# Altium PCB US_Driver.PcbDoc
Units mm, origin at the board's own origin, x right, y up, seen from the top; angles counter-clockwise.
Board outline 99.96 x 100.21 mm, 2 copper layers (Top Layer, Bottom Layer); 72 components, 39 nets, 187 pads, 0 vias.
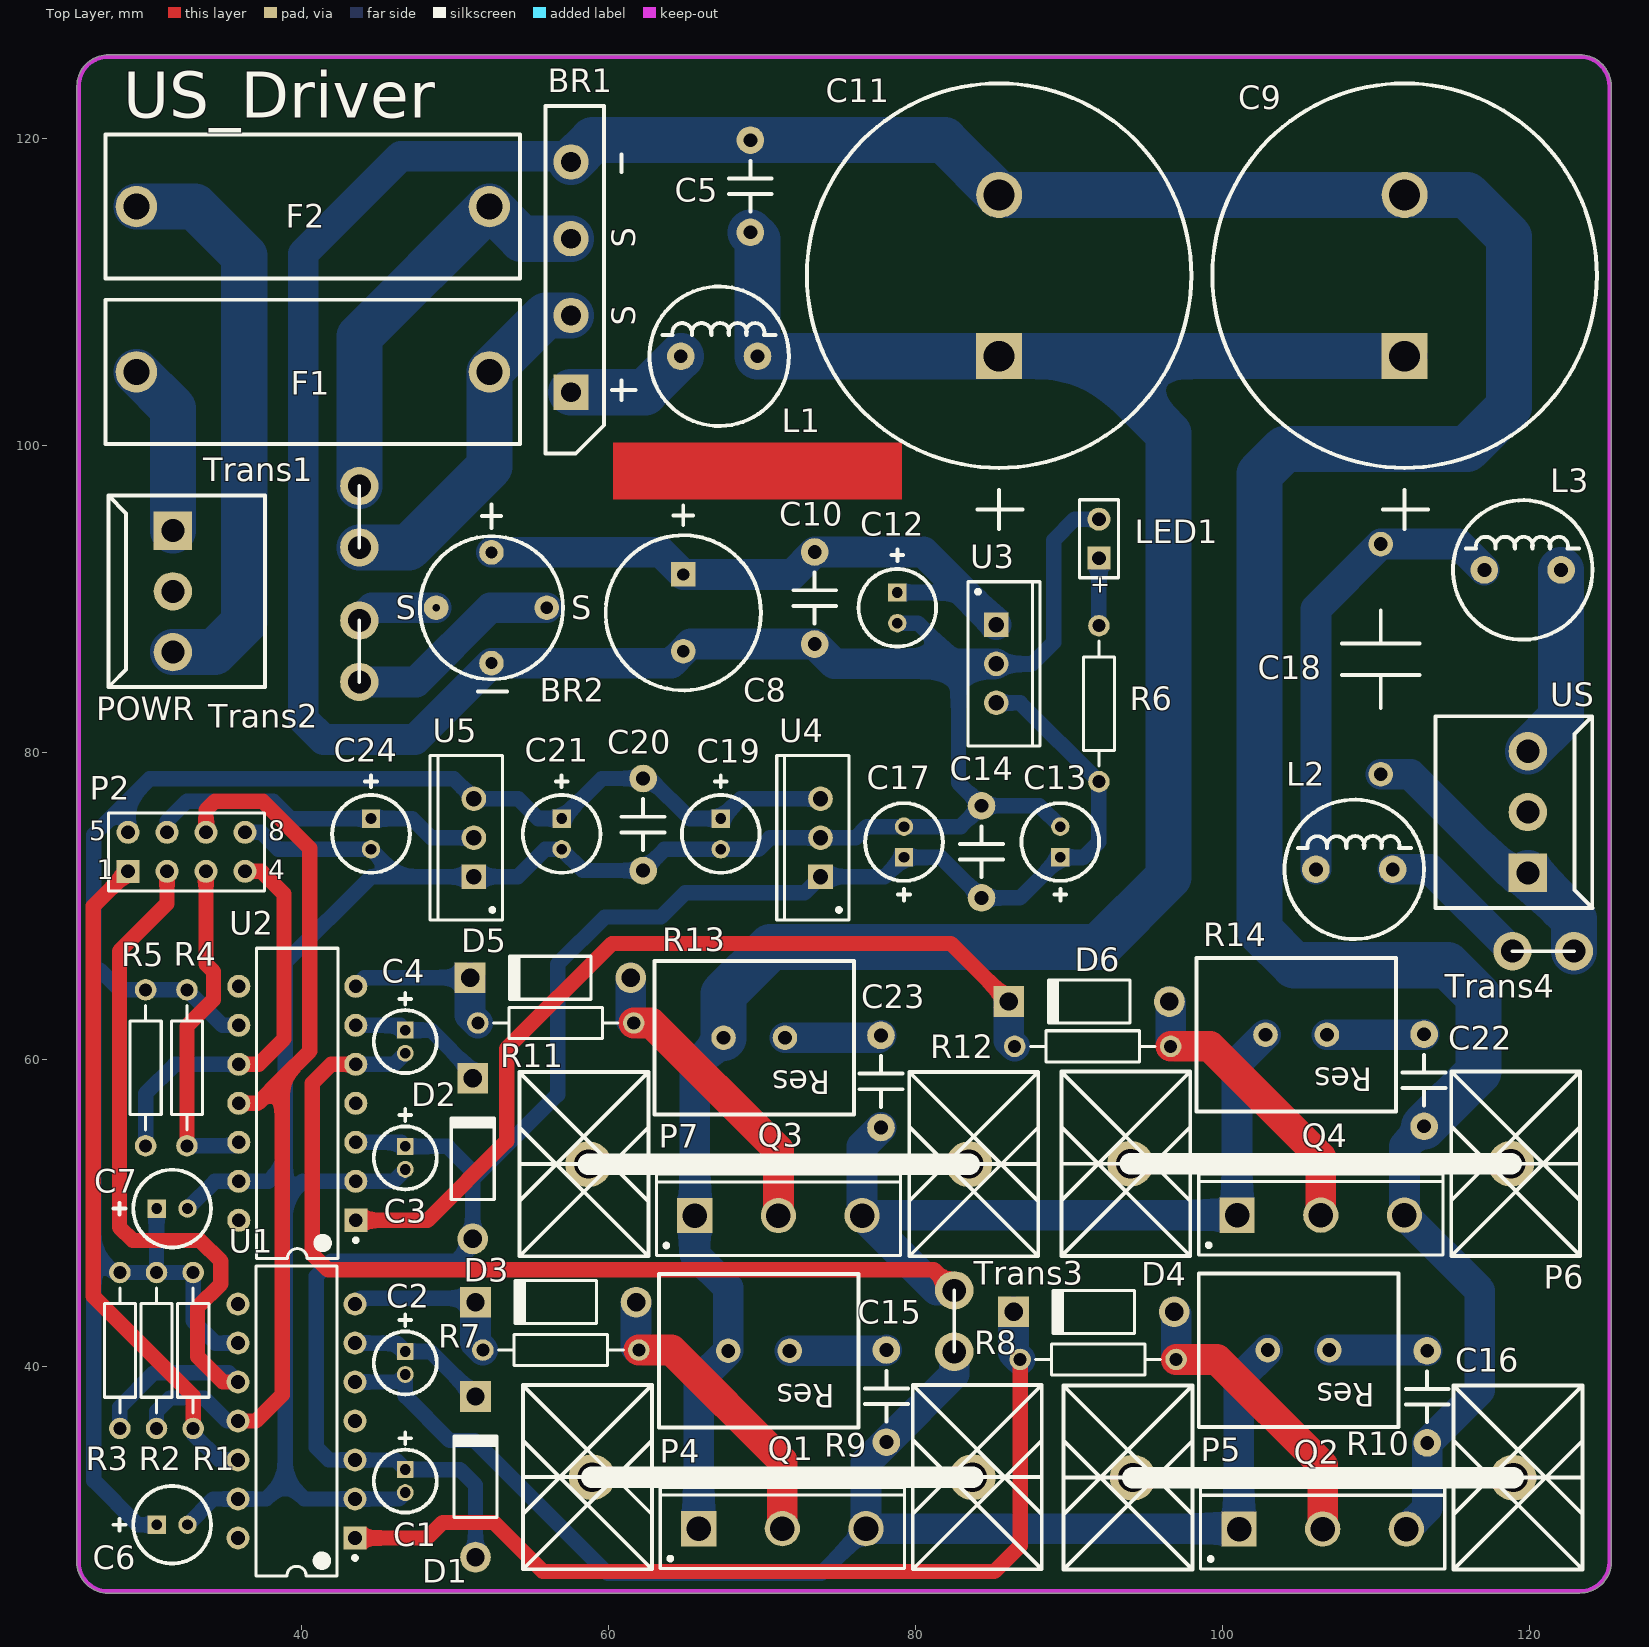
[diagram p0: Top Layer view]
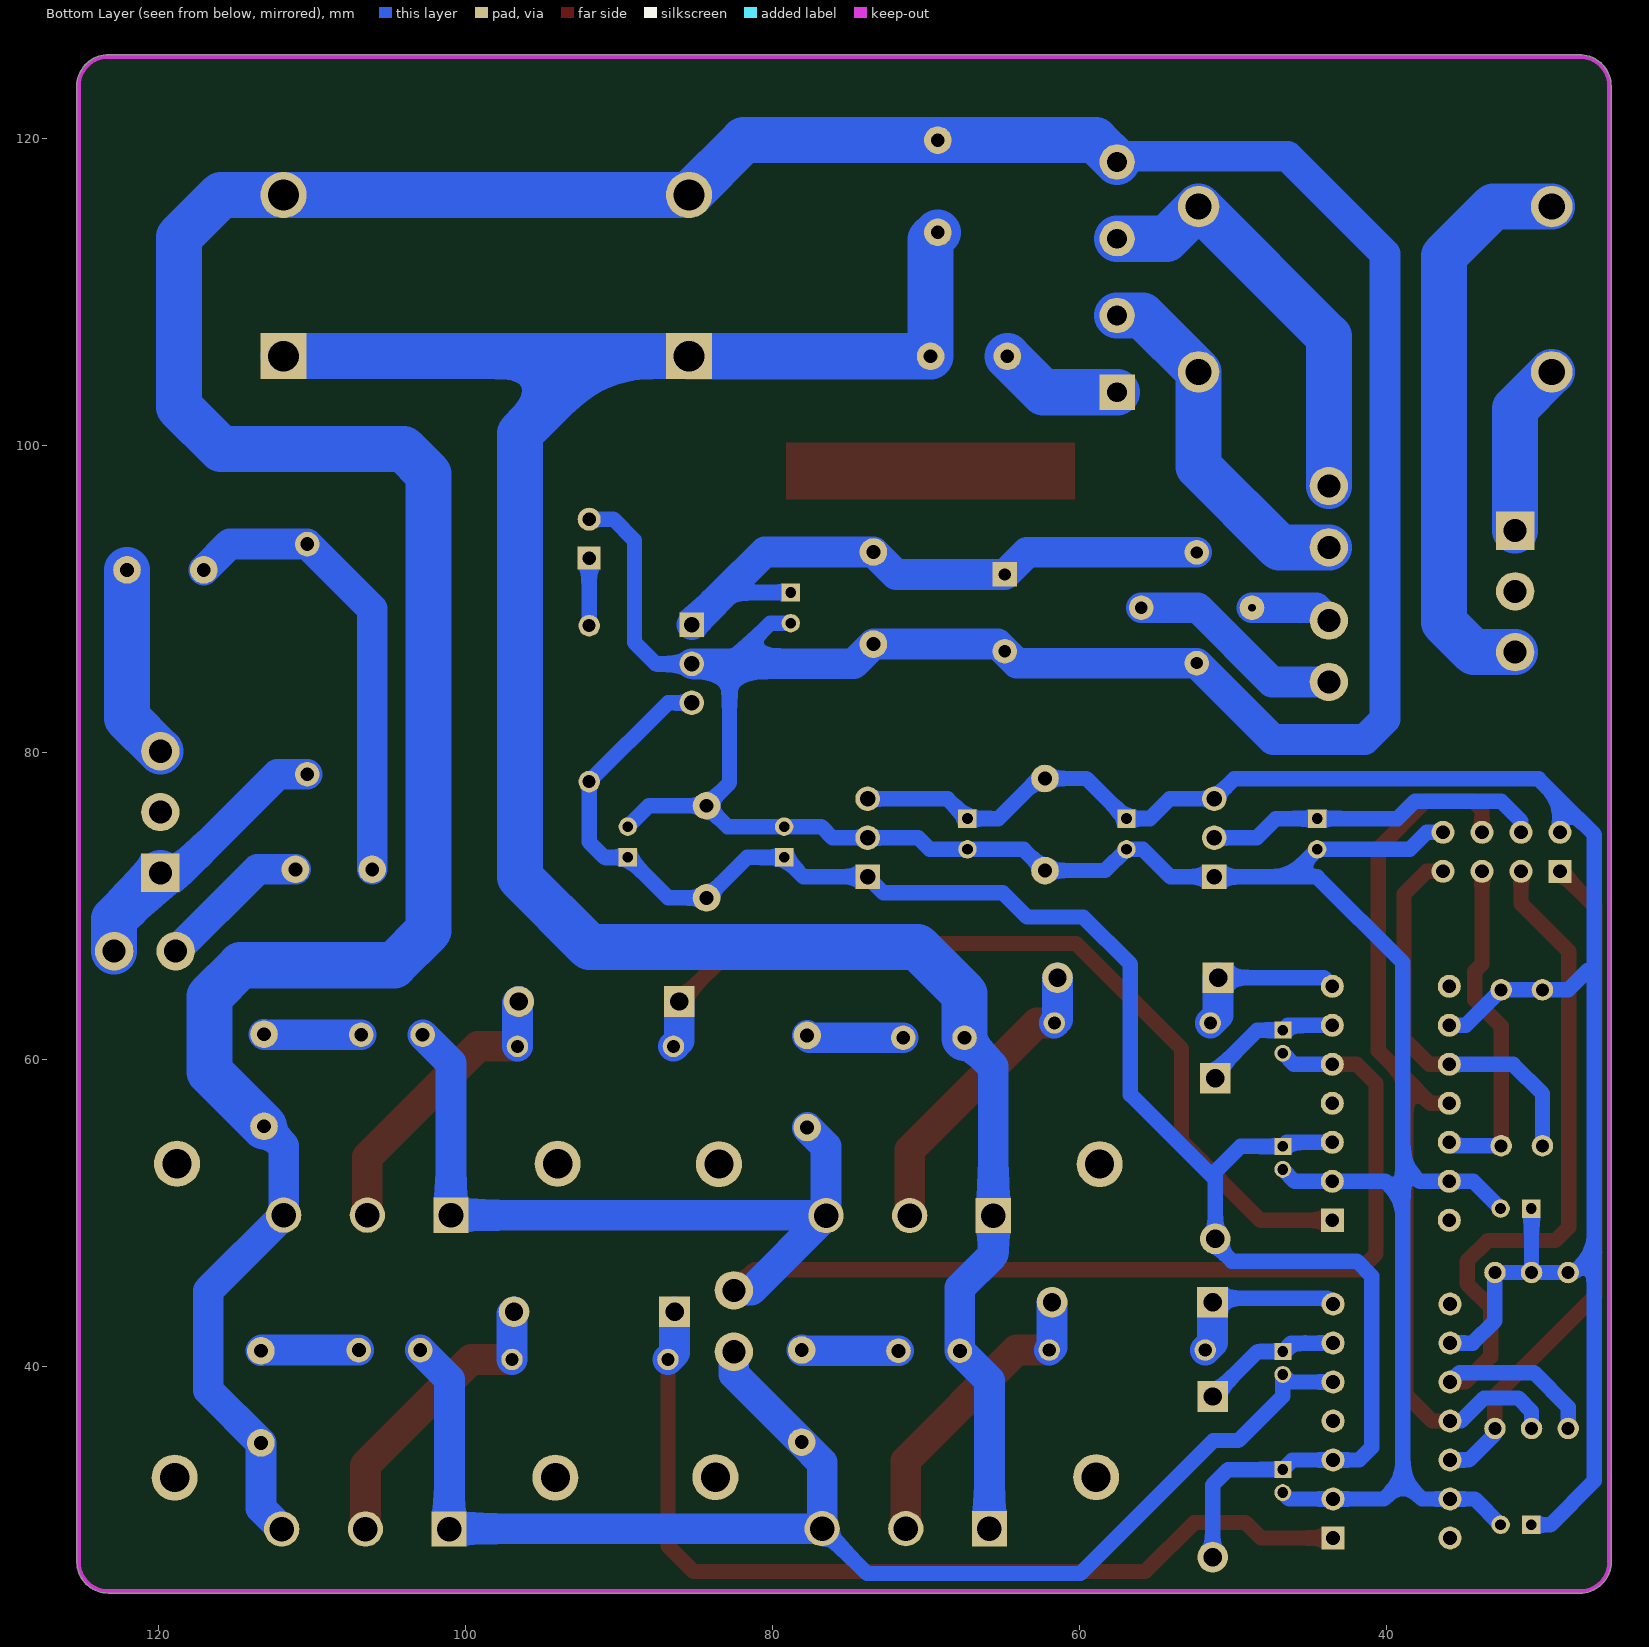
[diagram p1: Bottom Layer view, seen from below]

## Layer stack, top to bottom
Top Solder: solder mask 0.0102, Solder Resist, Dk 3.5
Top Layer: signal copper 0.0356
Dielectric 1: dielectric 0.32, FR-4, Dk 4.8
Bottom Layer: signal copper 0.0356
Bottom Solder: solder mask 0.0102, Solder Resist, Dk 3.5

## Board outline
25.391,27.305 ccw(c27.432,27.305) 27.432,25.264 ccw(c27.432,25.392) 27.477,25.273 123.28,25.273 ccw(c123.292,25.399) 123.29,25.272 ccw(c123.317,27.305) 125.35,27.278 ccw(c125.222,27.28) 125.35,27.28 ccw(c125.222,27.28) 125.347,27.306 ccw(c125.222,27.33) 125.349,27.33 125.349,123.444 ccw(c123.317,123.444) 123.276,125.476 ccw(c123.266,125.349) 123.266,125.476 27.508,125.476 ccw(c27.508,125.349) 27.493,125.475 ccw(c27.432,123.444) 25.4,123.444 ccw(c25.527,123.444) 25.4,123.444 ccw(c25.527,123.444) 25.4,123.444 25.4,27.35 ccw(c25.519,27.305)

## Design rules (kind name [scope] priority, off if disabled: settings)
Clearance [All] p1: gap=0.254
PolygonConnect [All] p1: connectstyle=Relief reliefconductorwidth=0.254 reliefentries=4 polygonreliefangle="90 Angle" airgapwidth=0.254
RoutingVias [All] p1: holewidth=0.711 width=1.27 viastyle="Through Hole" minholewidth=0.711 minwidth=1.27 maxholewidth=0.711 maxwidth=1.27
SolderMaskExpansion [All] p1: expansion=0.102
UnpouredPolygon [All] p1: allowunpoured=FALSE
Width Width_POWER [InNet('300V','15V','5V','3.3V')] p1: maxlimit=3 minlimit=1 preferedwidth=2
Width [All] p2: maxlimit=3 minlimit=0.254 preferedwidth=1
29 further rules are at their usual default settings.

## Components (designator, comment, footprint, x,y, rotation, side; value= is the part's Value field where it differs from the comment)
BR1 "BRIDGE" GBU4M 57.582,110.998 r90 top
BR2 "BRIDGE" BR_CIRCLE 52.4,89.458 r0 top
C1 "Cap Pol3" Cap_4*7 46.787,32.563 r270 top
C2 "Cap Pol3" Cap_4*7 46.787,40.259 r270 top
C3 "Cap Pol3" Cap_4*7 46.787,53.619 r270 top
C4 "Cap Pol3" Cap_4*7 46.787,61.189 r270 top
C5 "Cap Semi" 瓷片电容 69.266,116.916 r270 top
C6 "Cap Pol3" Cap_5*11 31.598,29.718 r0 top
C7 "Cap Pol3" Cap_5*11 31.598,50.317 r0 top
C8 "Cap Pol1" Cap_10*20 64.897,89.129 r270 top
C9 "Cap Pol1" Cap_450V 111.887,111.1 r90 top
C10 "Cap Semi" 瓷片电容 73.457,90.093 r90 top
C11 "Cap Pol1" Cap_450V 85.471,111.1 r90 top
C12 "Cap Pol1" Cap_5*11 78.842,89.453 r270 top
C13 "Cap Pol1" Cap_5*11 89.459,74.198 r90 top
C14 "Cap Semi" 瓷片电容 84.328,73.558 r270 top
C15 "Cap" 瓷片电容 78.13,38.1 r90 top
C16 "Cap" 瓷片电容 113.36,38.049 r90 top
C17 "Cap Pol1" Cap_5*11 79.273,74.198 r90 top
C18 "Cap" Cap_15 110.338,86.106 r90 top
C19 "Cap Pol1" Cap_5*11 67.335,74.722 r270 top
C20 "Cap Semi" 瓷片电容 62.281,75.336 r90 top
C21 "Cap Pol1" Cap_5*11 56.972,74.722 r270 top
C22 "Cap" 瓷片电容 113.157,58.674 r90 top
C23 "Cap" 瓷片电容 77.775,58.598 r90 top
C24 "Cap Pol1" Cap_5*11 44.552,74.722 r270 top
D1 "1N4007" DO-41 51.359,32.842 r90 top
D2 "1N4007" DO-41 51.181,53.569 r90 top
D3 "1N4007" DO-41 56.591,44.221 r180 top
D4 "1N4007" DO-41 91.643,43.586 r180 top
D5 "1N4007" DO-41 56.236,65.354 r180 top
D6 "1N4007" DO-41 91.338,63.805 r180 top
F1 "Fuse" FUSE 40.767,104.826 r0 top
F2 "Fuse" FUSE 40.767,115.595 r0 top
L1 "Inductor" 工字电感8*10 67.234,105.842 r0 top
L2 "Inductor" 工字电感8*10 108.61,72.415 r0 top
L3 "Inductor" 工字电感8*10 119.583,91.923 r0 top
LED1 "LED1" BAT-2 91.973,93.955 r90 top
P2 "Header 4X2A" HDR2X4_CEN 28.727,72.288 r0 top
P4 "散热片" 散热器_TO247 71.349,32.817 r180 top
P5 "散热片" 散热器_TO247 106.578,32.791 r180 top
P6 "散热片" 散热器_TO247 106.426,53.238 r180 top
P7 "散热片" 散热器_TO247 71.12,53.213 r180 top
POWR "POWR" CH3.96-3P 31.648,90.526 r270 top (schematic designator P1)
Q1 "MOSFET-N" TO-247 71.349,29.464 r0 top
Q2 "MOSFET-N" TO-247 106.553,29.439 r0 top
Q3 "MOSFET-N" TO-247 71.095,49.86 r0 top
Q4 "MOSFET-N" TO-247 106.426,49.886 r0 top
R1 "Res2" AXIAL-0.4 32.969,41.072 r90 top
R2 "Res2" AXIAL-0.4 30.582,41.072 r90 top
R3 "Res2" AXIAL-0.4 28.194,41.072 r90 top
R4 "Res2" AXIAL-0.4 32.563,59.487 r90 top
R5 "Res2" AXIAL-0.4 29.87,59.487 r90 top
R6 "Res2" AXIAL-0.4 91.973,83.21 r270 top
R7 "Res2" AXIAL-0.4 56.921,41.097 r0 top
R8 "Res2" AXIAL-0.4 91.923,40.488 r0 top
R9 "Res2" Res_10W_立式 69.825,41.046 r180 top
R10 "Res2" Res_10W_立式 104.978,41.097 r180 top
R11 "Res2" AXIAL-0.4 56.591,62.408 r0 top
R12 "Res2" AXIAL-0.4 91.567,60.884 r0 top
R13 "Res2" Res_10W_立式 69.52,61.443 r180 top
R14 "Res2" Res_10W_立式 104.826,61.646 r180 top
Trans1 "Trans_Part" Trans_Part 43.79,91.389 r270 top
Trans2 "Trans_Part" Trans_Part 43.79,90.627 r90 top
Trans3 "Trans_Part" Trans_Part 82.55,38.989 r270 top
Trans4 "Trans_Part" Trans_Part 124.917,67.081 r0 top
U1 "IR2110" DIP-14 39.7,36.474 r180 top
U2 "IR2110" DIP-14 39.751,57.175 r180 top
U3 "7815" TO-220AB 85.293,85.801 r270 top
U4 "7805" TO-220AB 73.838,74.473 r90 top
U5 "AMS1117-3.3" TO-220AB 51.257,74.473 r90 top
US "US" CH3.96-3P 119.913,76.149 r90 top (schematic designator P3)

## Footprints (in the part's own frame and the unit in brackets; to place one, negate y for a bottom-side part, rotate by r counter-clockwise, add the part's x,y. Pads: shape width x height; smd on the part's side, far side on the other; paste and mask are expansions set on the pad)
AXIAL-0.4 [mm] "Axial Device, Thru-Hole; 2 Leads; 0.4 in Pin Spacing"
  round 1.4 hole 0.85: 1(-5.08,0) 2(5.08,0)
  silkscreen extent -4.06,-1.02 4.06,1.02
BAT-2 [mm] "Battery; 2 Leads"
  rect 1.5x1.5 hole 0.9: 1(-1.27,0)
  round 1.5 hole 0.9: 2(1.27,0)
  silkscreen extent -2.54,-1.27 2.54,1.27
BR_CIRCLE [mm]
  round 1.6 hole 0.8: 1(0,3.606) 3(0,-3.606) 4(3.606,0)
  round 1.6 hole 0.5: 2(-3.606,0)
  silkscreen extent -4.66,-5.46 4.66,6.73
Cap_4*7 [mm] "Chip Capacitor, Body 2.0x1.3mm, IPC High Density"
  rect 1.1x1.1 hole 0.7: 1(-0.75,0)
  round 1.1 hole 0.7: 2(0.75,0)
  silkscreen extent -3.17,-2.05 2.05,2.05
Cap_5*11 [mm] "Chip Capacitor, Body 2.0x1.3mm, IPC High Density"
  rect 1.2x1.2 hole 0.7: 1(-1,0)
  round 1.2 hole 0.7: 2(1,0)
  silkscreen extent -3.81,-2.53 2.53,2.53
Cap_10*20 [mm] "Polarized Capacitor (Radial); 2 Leads"
  rect 1.6x1.6 hole 0.8: 1(-2.5,0)
  round 1.6 hole 0.8: 2(2.5,0)
  silkscreen extent -6.98,-5.05 5.06,5.06
Cap_15 [mm] "CBB无极15mm脚距"
  round 1.6 hole 0.9: 1(-7.5,0) 2(7.5,0)
  silkscreen extent -3.17,-2.54 3.17,2.54
Cap_450V [mm] "Polarized Capacitor (Radial); 2 Leads"
  rect 3x3 hole 2: 1(-5.25,0)
  round 3 hole 2: 2(5.25,0)
  silkscreen extent -16.51,-12.52 12.52,12.52
CH3.96-3P [mm] "接线端子插座"
  rect 2.5x2.5 hole 1.5: 1(-3.96,0)
  round 2.5 hole 1.5: 2(0,0) 3(3.96,0)
  silkscreen extent -6.24,-4.21 6.24,6
DIP-14 [mm] "DIP; 14 Leads; Row Spacing 7.62 mm; Pitch 2.54 mm"
  rect 1.5x1.5 hole 0.9: 1(-3.81,7.62)
  round 1.5 hole 0.9: 2(-3.81,5.08) 3(-3.81,2.54) 4(-3.81,0) 5(-3.81,-2.54) 6(-3.81,-5.08) 7(-3.81,-7.62) 8(3.81,-7.62) 9(3.81,-5.08) 10(3.81,-2.54) 11(3.81,0) 12(3.81,2.54) 13(3.81,5.08) 14(3.81,7.62)
  silkscreen extent -3.94,-10.1 2.65,10.1, body extent -3.6,-10.1 3.6,10.1, height 5.08
DO-41 [mm] "Diode, Axial; Body 5.2 x 2.7 mm (LxDia. max), Lead Dia. 0.86 mm (max)"
  round 2 hole 1.2: 1(-5.23,0)
  rect 2x2 hole 1.2: 2(5.23,0)
  silkscreen extent -2.65,-1.4 2.75,1.4
FUSE [mm] "保险丝座"
  round 2.7 hole 1.7: 1(-11.5,0) 2(11.5,0)
  silkscreen extent -13.5,-4.7 13.5,4.7
GBU4M [mm]
  rect 2.3x2.3 hole 1.3: 1(-7.5,0)
  round 2.3 hole 1.3: 2(-2.5,0) 3(2.5,0) 4(7.5,0)
  silkscreen extent -11.5,-4.19 11.15,1.65
HDR2X4_CEN [mm] "Connector; Header; 4x2 Position"
  rect 1.5x1.5 hole 0.9: 1(0,0)
  round 1.5 hole 0.9: 2(2.54,0) 3(5.08,0) 4(7.62,0) 5(0,2.54) 6(2.54,2.54) 7(5.08,2.54) 8(7.62,2.54)
  silkscreen extent -1.27,-1.27 8.89,3.81
Res_10W_立式 [mm] "立式水泥电阻"
  round 1.6 hole 0.9: 1(-2,0) 2(2,0)
  silkscreen extent -6.5,-5 6.5,5
TO-220AB [mm] "TO, Thru-Hole, Vertical, Heatsink Mounted; 3 In-Line Leads; Pitch 2.54 mm"
  rect 1.6x1.6 hole 1: 1(-2.54,0)
  round 1.6 hole 1: 2(0,0) 3(2.54,0)
  silkscreen extent -5.35,-1.85 5.35,2.85, body extent -5.4,-1.9 5.4,2.9, height 19.3
TO-247 [mm] "SIP with Mounting Hole; 3 Leads; Body 20 x 15.6 x 5 mm (typ); Pitch 5.45 mm"
  rect 2.3x2.3 hole 1.6: 1(-5.45,0)
  round 2.3 hole 1.6: 2(0,0) 3(5.45,0)
  silkscreen extent -7.95,-2.6 7.95,2.7, body extent -7.95,-2.6 7.95,2.7, height 24.6
Trans_Part [mm] "变压器单个绕组"
  round 2.5 hole 1.5: 1(-6,0) 2(-2,0)
  silkscreen extent -6,0 -2,0
工字电感8*10 [mm] "Chip Inductor, Body 1.0x0.5mm, IPC High Density"
  round 1.8 hole 0.9: 1(-2.5,0) 2(2.5,0)
  silkscreen extent -4.54,-4.54 4.54,4.54
散热器_TO247 [mm]
  round 3 hole 1.9: 1(-12.4,0) 2(12.4,0)
  silkscreen extent -16.9,-6 16.9,6
瓷片电容 [mm] "6mm脚距"
  round 1.8 hole 0.9: 1(-3,0) 2(3,0)
  silkscreen extent -1.65,-1.4 1.65,1.4

## Part data
BR1: "BR"
BR2: library part BRIDGE_Circle, "BR"
C1 C2 C3 C4 C6 C7: "Polarized Capacitor (Surface Mount)"
C5 C10 C14 C20: "Capacitor (Semiconductor SIM Model)"
C8 C9 C11 C12 C13 C17 C19 C21 C24: "Polarized Capacitor (Radial)"
C15 C16 C18 C22 C23: "Capacitor"
D1 D2 D3 D4 D5 D6: library part "Diode 1N4007", "1 Amp General Purpose Rectifier"
LED1: "Typical RED GaAs LED"
P2: "Header, 4-Pin, Dual row"
POWR US: library part "Header 3", "Header, 3-Pin"
Q1 Q2 Q3 Q4: "N-Channel MOSFET"
R1 R2 R3 R4 R5 R6 R7 R8 R9 R10 R11 R12 R13 R14: "Resistor"
U3: library part 7805

## Nets (pads, with @x,y where several pads share a name; then routed paths per layer and width w, separated by ;. In a path a pad name is that pad's centre, name@x,y a point inside that pad or via, vN(x,y) a via of type N, cw(c..) or ccw(c..) an arc to the next point about the centre after c; other vN are vias at no path point)
3.3V: C24.1 P2.6 U5.2 | length 22.3
  Bottom Layer w1: P2.6 31.267,75.565 32.563,76.86 38.176,76.86 39.315,75.722 C24.1 47.239,75.722 48.489,74.473 U5.2
5V: C6.1 C7.1 C19.1 C20.2 C21.1 P2.5 R1.2 R2.2 R3.2 R4.2 R5.2 U1.9 U2.9 U4.3 U5.3 | length 130.5
  Bottom Layer w1: 26.899,65.862 28.194,64.567 R5.2 R4.2 34.874,62.255 U2.9 ; P2.5 28.727,76.911 ; C6.1 29.362,29.718 26.492,32.588 26.492,47.473 ; C7.1 30.582,50.301 R2.2 ; U1.9 34.417,41.554 32.969,43.002 R1.2 R2.2 ; U4.3 68.626,77.013 C19.1 65.324,75.722 62.71,78.336 C20.2 59.587,78.336 C21.1 55.444,75.722 54.153,77.013 U5.3 49.962,78.308 30.124,78.308 28.727,76.911 ; 26.492,47.473 26.492,74.676 28.727,76.911 ; 26.492,47.473 27.813,46.152 R3.2 R2.2
15V: C1.1 C3.1 C13.1 C14.2 C17.1 D1.1 D2.1 R6.2 U1.3 U2.3 U3.3 U4.1 | length 121.3
  Bottom Layer w1: U2.3 46.521,54.635 C3.1 49.542,54.369 51.181,52.73 51.181,52.197 ; D1.1 51.359,32.309 50.355,33.313 C1.1 46.165,33.934 U1.3 41.808,33.934 40.996,34.747 40.996,45.923 41.961,46.888 50.112,46.888 51.181,47.958 51.181,52.197 ; U3.3 86.843,83.261 R6.2 91.973,74.193 90.978,73.198 C13.1 86.819,70.558 C14.2 81.688,73.198 C17.1 78.008,71.933 U4.1 72.796,70.891 65.024,70.891 63.449,69.317 59.792,69.317 56.718,66.243 56.718,57.734 51.181,52.197
300V: C5.2 C9.1 C11.1 L1.2 Q1.1 Q3.1 R9.2 R13.2 | length 155.9
  Bottom Layer w2: Q1.1 65.899,39.12 R9.2 67.825,45.155 65.645,47.335 Q3.1 65.645,59.567 R13.2
  Bottom Layer w3: R13.2 67.52,64.294 70.587,67.361 91.948,67.361 96.495,71.907 96.495,100.813 91.458,105.85 ; C5.2 69.734,113.448 L1.2 85.463,105.842 C11.1 91.458,105.85 ; C9.1 91.458,105.85
BR1: D3.2 R7.1 U1.7 | length 11.4
  Bottom Layer w1: U1.7 43.891,44.475 51.107,44.475 D3.2
  Bottom Layer w2: D3.2 51.361,41.577 R7.1
BR2: D4.2 R8.1 U1.1 | length 61.2
  Top Layer w1: U1.1 48.209,28.854 49.225,29.87 52.553,29.87 55.753,26.67 85.166,26.67 86.843,28.346 R8.1
  Bottom Layer w2: D4.2 86.413,40.917 R8.1
BR3: D5.2 R11.1 U2.7 | length 10.8
  Bottom Layer w1: U2.7 44.12,65.354 D5.2
  Bottom Layer w2: D5.2 51.006,62.913 R11.1
BR4: D6.2 R12.1 U2.1 | length 58.2
  Top Layer w1: U2.1 48.235,49.555 53.391,54.712 53.391,60.731 60.249,67.589 82.324,67.589 D6.2
  Bottom Layer w2: D6.2 86.108,61.262 R12.1
CT_1: P2.1 R1.1 U1.12 | length 43.9
  Top Layer w1: P2.1 26.467,70.028 26.467,44.602 32.969,38.1 R1.1
  Bottom Layer w1: R1.1 32.969,35.636 34.671,33.934 U1.12
CT_2: P2.2 R3.1 U1.10 | length 52.4
  Top Layer w1: P2.2 31.267,70.18 28.169,67.081 28.169,49.098 29.032,48.235 33.426,48.235 34.773,46.888 34.773,45.415 33.249,43.891 33.249,40.665 34.9,39.014 U1.10
  Bottom Layer w1: R3.1 28.194,37.389 30.429,39.624 35.281,39.624 U1.10
CT_3: P2.3 R4.1 U2.12 | length 22.3
  Top Layer w1: R4.1 32.563,62.205 34.29,63.932 34.29,65.761 33.807,66.243 P2.3
  Bottom Layer w1: R4.1 35.712,54.407 U2.12
CT_4: P2.4 R5.1 U2.10 | length 26.5
  Top Layer w1: U2.10 37.236,59.715 38.887,61.366 38.887,70.815 37.414,72.288 P2.4
  Bottom Layer w1: R5.1 29.87,57.81 31.775,59.715 U2.10
GND: BR1.4 BR2.3 C1.2 C3.2 C5.1 C6.2 C7.2 C8.2 C9.2 C10.1 C11.2 C12.2 C13.2 C14.1 C16.1 C17.2 C19.2 C20.1 C21.2 C22.1 C24.2 LED1.2 P2.8 Q2.3 Q4.3 U1.2 U1.13 U2.2 U2.13 U3.2 U4.2 U5.1 | length 442.4
  Bottom Layer w1: C6.2 34.274,31.394 U1.13 37.719,31.394 38.964,32.639 ; C7.2 34.376,52.095 U2.13 37.871,52.095 38.964,53.188 ; P2.8 37.414,74.828 38.521,73.722 C24.2 46.341,71.933 ; C1.2 46.368,31.394 U1.2 40.208,31.394 38.964,32.639 ; C3.2 46.013,52.095 U2.2 40.107,52.095 38.964,50.952 ; C12.2 80.177,88.453 82.829,85.801 82.829,78.057 C14.1 ; U3.2 87.63,85.801 89.027,87.198 89.027,93.853 90.399,95.225 LED1.2 ; C13.2 88.099,76.558 C14.1 ; 38.964,32.639 38.964,50.952 ; 38.964,50.952 38.964,53.188 ; 38.964,53.188 38.964,66.345 44.552,71.933 46.341,71.933 ; 46.341,71.933 U5.1 54.102,71.933 55.891,73.722 C21.2 58.358,72.336 C20.1 63.666,73.722 C19.2 69.785,73.722 70.536,74.473 U4.2 76.124,74.473 76.849,75.198 C17.2 82.968,75.198 C14.1
  Bottom Layer w2: BR1.4 57.208,118.872 46.482,118.872 40.132,112.522 40.132,82.194 41.453,80.874 47.422,80.874 BR2.3 64.12,85.852 C8.2 65.361,87.093 C10.1 74.749,85.801 82.829,85.801 U3.2 ; Q2.3 113.36,30.796 C16.1 116.789,38.478 116.789,44.972 Q4.3 111.876,54.393 C22.1
  Bottom Layer w3: BR1.4 59,119.916 C5.1 81.904,119.916 C11.2 C9.2 115.959,116.35 118.694,113.614 118.694,102.54 115.951,99.797 104.064,99.797 102.438,98.171 102.438,68.428 104.699,66.167 114.681,66.167 116.713,64.135 116.713,59.23 C22.1
IR_EN: P2.7 R2.1 U1.11 U2.11 | length 60.5
  Top Layer w1: P2.7 33.807,76.276 34.392,76.86 37.49,76.86 40.564,73.787 40.564,60.579 38.76,58.776 ; U1.11 37.059,36.474 38.76,38.176 38.76,58.776 ; U2.11 37.16,57.175 38.76,58.776
  Bottom Layer w1: R2.1 30.582,37.109 31.445,37.973 33.68,37.973 35.179,36.474 U1.11
NetBR1_1: BR1.1 L1.1 | length 8.1
  Bottom Layer w3: BR1.1 62.39,103.498 L1.1
NetBR1_2: BR1.2 F1.2 Trans1.2 | length 23.7
  Bottom Layer w3: Trans1.2 47.009,93.389 52.267,98.647 F1.2 55.939,108.498 BR1.2
NetBR1_3: BR1.3 F2.2 Trans1.1 | length 27.9
  Bottom Layer w3: Trans1.1 43.79,107.118 F2.2 54.364,113.498 BR1.3
NetBR2_1: BR2.1 C8.1 C10.2 C12.1 U3.1 | length 40.4
  Bottom Layer w1: C12.1 83.181,90.453
  Bottom Layer w2: BR2.1 63.461,93.064 C8.1 71.992,91.629 C10.2 80.541,93.093 83.181,90.453 U3.1
NetBR2_2: BR2.2 Trans2.2 | length 5.3
  Bottom Layer w2: Trans2.2 44.62,89.458 BR2.2
NetBR2_4: BR2.4 Trans2.1 | length 14.2
  Bottom Layer w2: Trans2.1 47.492,84.627 52.323,89.458 BR2.4
NetC2_1: C2.1 D1.2 U1.6 | length 9.3
  Bottom Layer w1: U1.6 46.241,41.554 C2.1 48.422,41.009 D1.2
NetC4_1: C4.1 D2.2 U2.6 | length 9.7
  Bottom Layer w1: U2.6 46.47,62.255 C4.1 48.45,61.939 51.181,59.207 D2.2 D2.2@51.181,58.418
NetC15_2: C15.2 R9.1 | length 6.3
  Bottom Layer w2: R9.1 78.077,41.046 C15.2
NetC16_2: C16.2 R10.1 | length 6.4
  Bottom Layer w2: R10.1 113.312,41.097 C16.2
NetC18_1: C18.1 Trans4.2 US.1 | length 18.6
  Bottom Layer w2: C18.1 112.275,78.606 118.692,72.189 US.1
  Bottom Layer w3: US.1 122.917,69.185 Trans4.2
NetC18_2: C18.2 L2.1 L3.1 | length 30.4
  Bottom Layer w2: L2.1 106.11,89.379 C18.2 115.4,93.606 L3.1
NetC22_2: C22.2 R14.1 | length 6.3
  Bottom Layer w2: R14.1 113.129,61.646 C22.2
NetC23_2: C23.2 R13.1 | length 6.3
  Bottom Layer w2: R13.1 77.62,61.443 C23.2
NetD3_1: D3.1 Q1.2 R7.2 | length 20
  Top Layer w2: R7.2 64.135,41.097 71.349,33.884 Q1.2
  Bottom Layer w2: D3.1 61.821,41.277 R7.2
NetD4_1: D4.1 Q2.2 R8.2 | length 19.7
  Top Layer w2: R8.2 99.67,40.488 106.553,33.604 Q2.2
  Bottom Layer w2: D4.1 97.003,43.457 R8.2
NetD5_1: D5.1 Q3.2 R11.2 | length 20.2
  Top Layer w2: R11.2 62.814,62.408 71.095,54.127 Q3.2
  Bottom Layer w2: D5.1 61.466,62.613 R11.2
NetD6_1: D6.1 Q4.2 R12.2 | length 19.5
  Top Layer w2: R12.2 99.212,60.884 106.426,53.67 Q4.2
  Bottom Layer w2: D6.1 96.647,63.726 R12.2
NetF1_1: F1.1 POWR.1 | length 11.3
  Bottom Layer w3: F1.1 31.648,102.444 POWR.1
NetF2_1: F2.1 POWR.3 | length 37.7
  Bottom Layer w3: F2.1 33.071,115.595 36.297,112.37 36.297,88.519 34.343,86.566 POWR.3
NetL2_2: L2.2 Trans4.1 | length 10
  Bottom Layer w2: L2.2 113.583,72.415 Trans4.1
NetL3_2: L3.2 US.3 | length 12.7
  Bottom Layer w3: US.3 122.083,82.279 L3.2
NetLED1_1: LED1.1 R6.1 | length 4.4
  Bottom Layer w1: R6.1 LED1.1
VS_1: C2.2 C15.1 Q1.3 Q2.1 R10.2 Trans3.2 U1.5 | length 91.5
  Bottom Layer w1: U1.5 46.292,39.014 C2.2 46.787,38.1 49.682,35.204 51.308,35.204 59.969,26.543 73.878,26.543 Q1.3
  Bottom Layer w2: Trans3.2 82.55,39.52 C15.1 76.799,33.768 Q1.3 101.078,29.464 101.078,39.197 R10.2
VS_2: C4.2 C23.1 Q3.3 Q4.1 R14.2 Trans3.1 U2.5 | length 112
  Top Layer w1: U2.5 41.961,59.715 40.716,58.471 40.716,47.371 41.758,46.33 81.209,46.33 Trans3.1
  Bottom Layer w1: U2.5 46.064,59.715 C4.2
  Bottom Layer w2: C23.1 76.545,54.368 Q3.3 ; Trans3.1 81.416,44.989 Q3.3 ; R14.2 100.976,59.796 Q4.1 76.57,49.886 Q3.3
pads on no net: P4.1 P4.2 P5.1 P5.2 P6.1 P6.2 P7.1 P7.2 POWR.2 U1.4 U1.8 U1.14 U2.4 U2.8 U2.14 US.2

## Keep-outs
Keep-Out Layer:
  lines w0.254: 25.519,27.305 ccw(c27.432,27.305) 27.432,25.392 ; 25.527,27.297 25.527,123.444 cw(c27.432,123.444) 27.508,125.347 ; 27.424,25.4 123.292,25.4 ccw(c123.317,27.305) 125.222,27.28 ; 27.508,125.349 123.266,125.349 ; 123.266,125.348 cw(c123.317,123.444) 125.222,123.444 125.222,27.33

## Other copper
Top Layer:
  rectangle: 60.325,96.52 79.146,100.228

## Silkscreen, mask and mechanical layers (free items; w line width, h text height)
Top Overlay:
  text "US_Driver" at 28.397,121.387 h3
Top Solder:
  text "Niu.151211" at 61.265,97.358 h2
Bottom Solder:
  lines w1: 106.11,72.415 106.11,89.379 110.338,93.606 115.4,93.606 117.083,91.923 ; 110.338,78.606 112.224,78.606 118.641,72.189 119.913,72.189 122.917,69.185 122.917,67.081 ; 111.354,72.466 113.532,72.466 118.917,67.081 ; 119.913,80.109 122.083,82.279 122.083,91.923

## Text inside footprints (layer, text, board x,y; h text height)
BR1: Top Overlay "S" at 61.773,112.903 h1.52 r90; Top Overlay "S" at 61.773,107.823 h1.52 r90
BR2: Top Overlay "S" at 57.607,88.696 h1.52; Top Overlay "S" at 46.177,88.696 h1.52
LED1: Top Overlay "+" at 92.55,90.285 h1.15 r90
P2: Top Overlay "8" at 37.871,74.32 h1.27; Top Overlay "4" at 37.871,71.78 h1.27; Top Overlay "1" at 26.695,71.78 h1.27; Top Overlay "5" at 26.187,74.32 h1.27
R9: Top Overlay "Res" at 74.778,38.887 h1.52 r180
R10: Top Overlay "Res" at 109.931,38.938 h1.52 r180
R13: Top Overlay "Res" at 74.473,59.284 h1.52 r180
R14: Top Overlay "Res" at 109.779,59.487 h1.52 r180